# Altium PCB mofang.PcbDoc
Units mm, origin at the board's own origin, x right, y up, seen from the top; angles counter-clockwise.
Board outline 91.69 x 61.98 mm, 2 copper layers (Top Layer, Bottom Layer); 52 components, 59 nets, 291 pads, 70 vias.
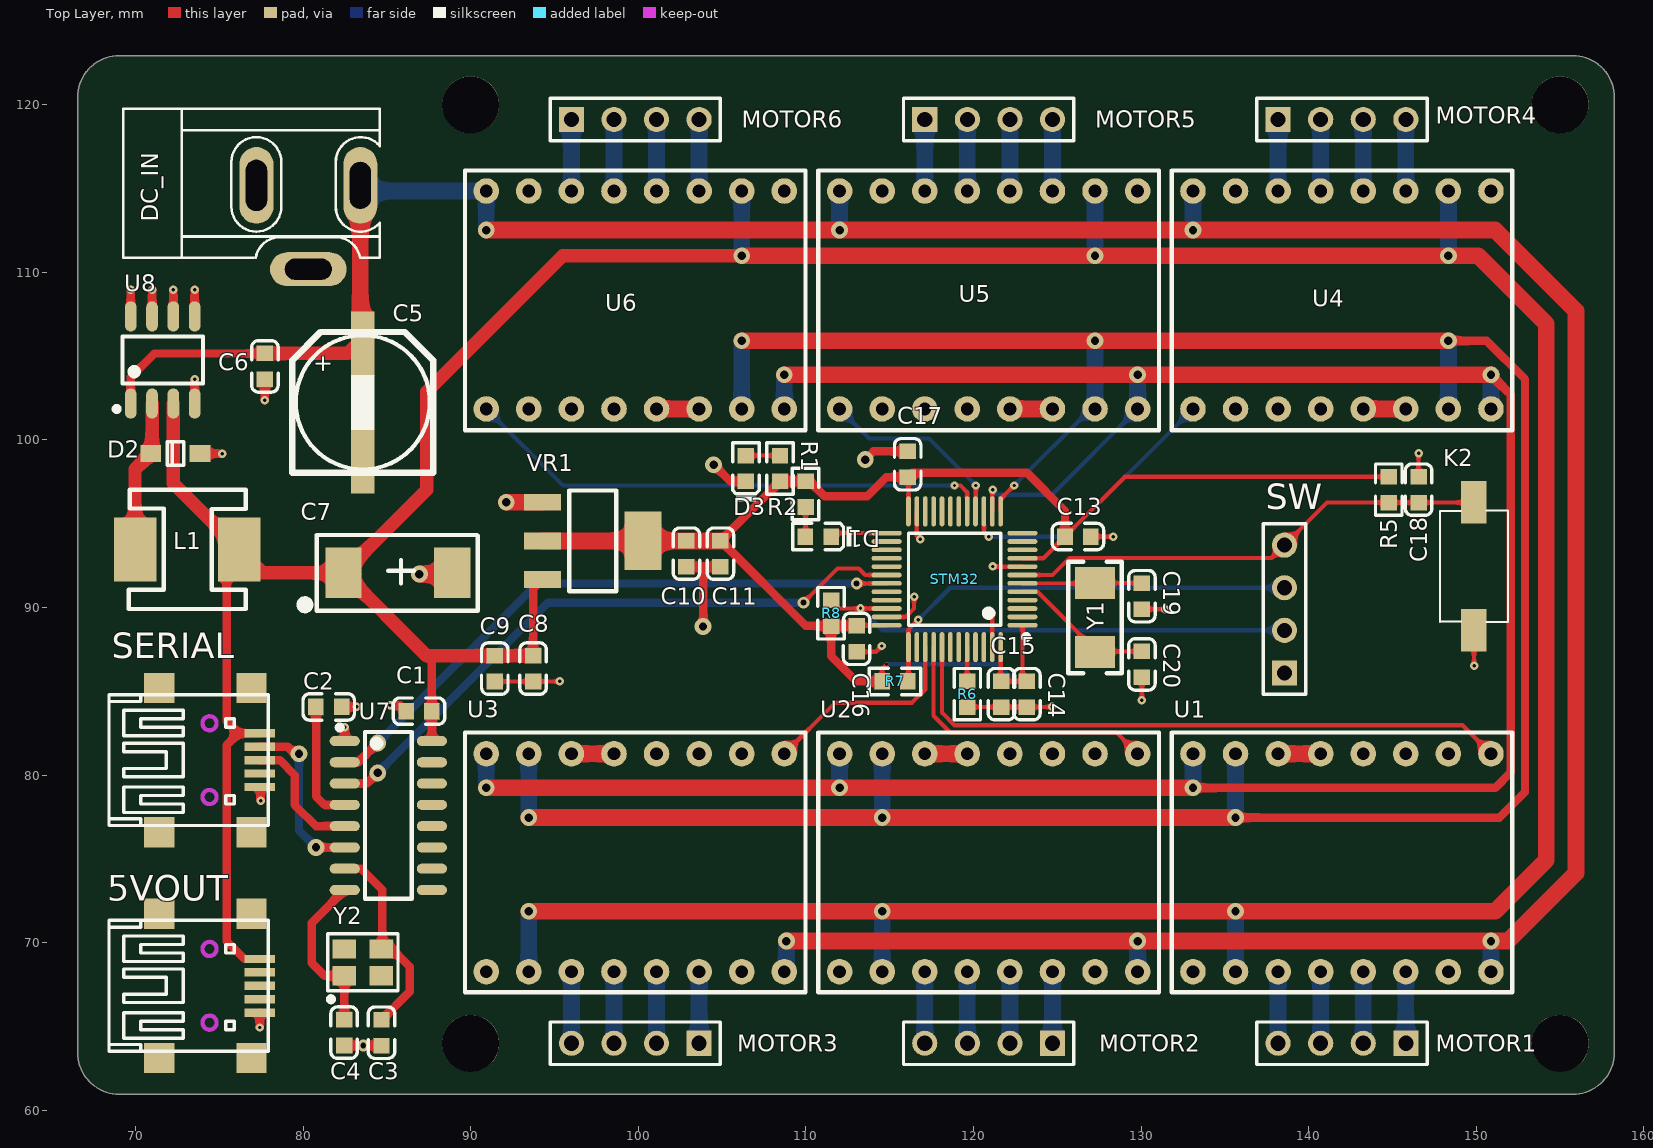
[diagram p0: Top Layer view]
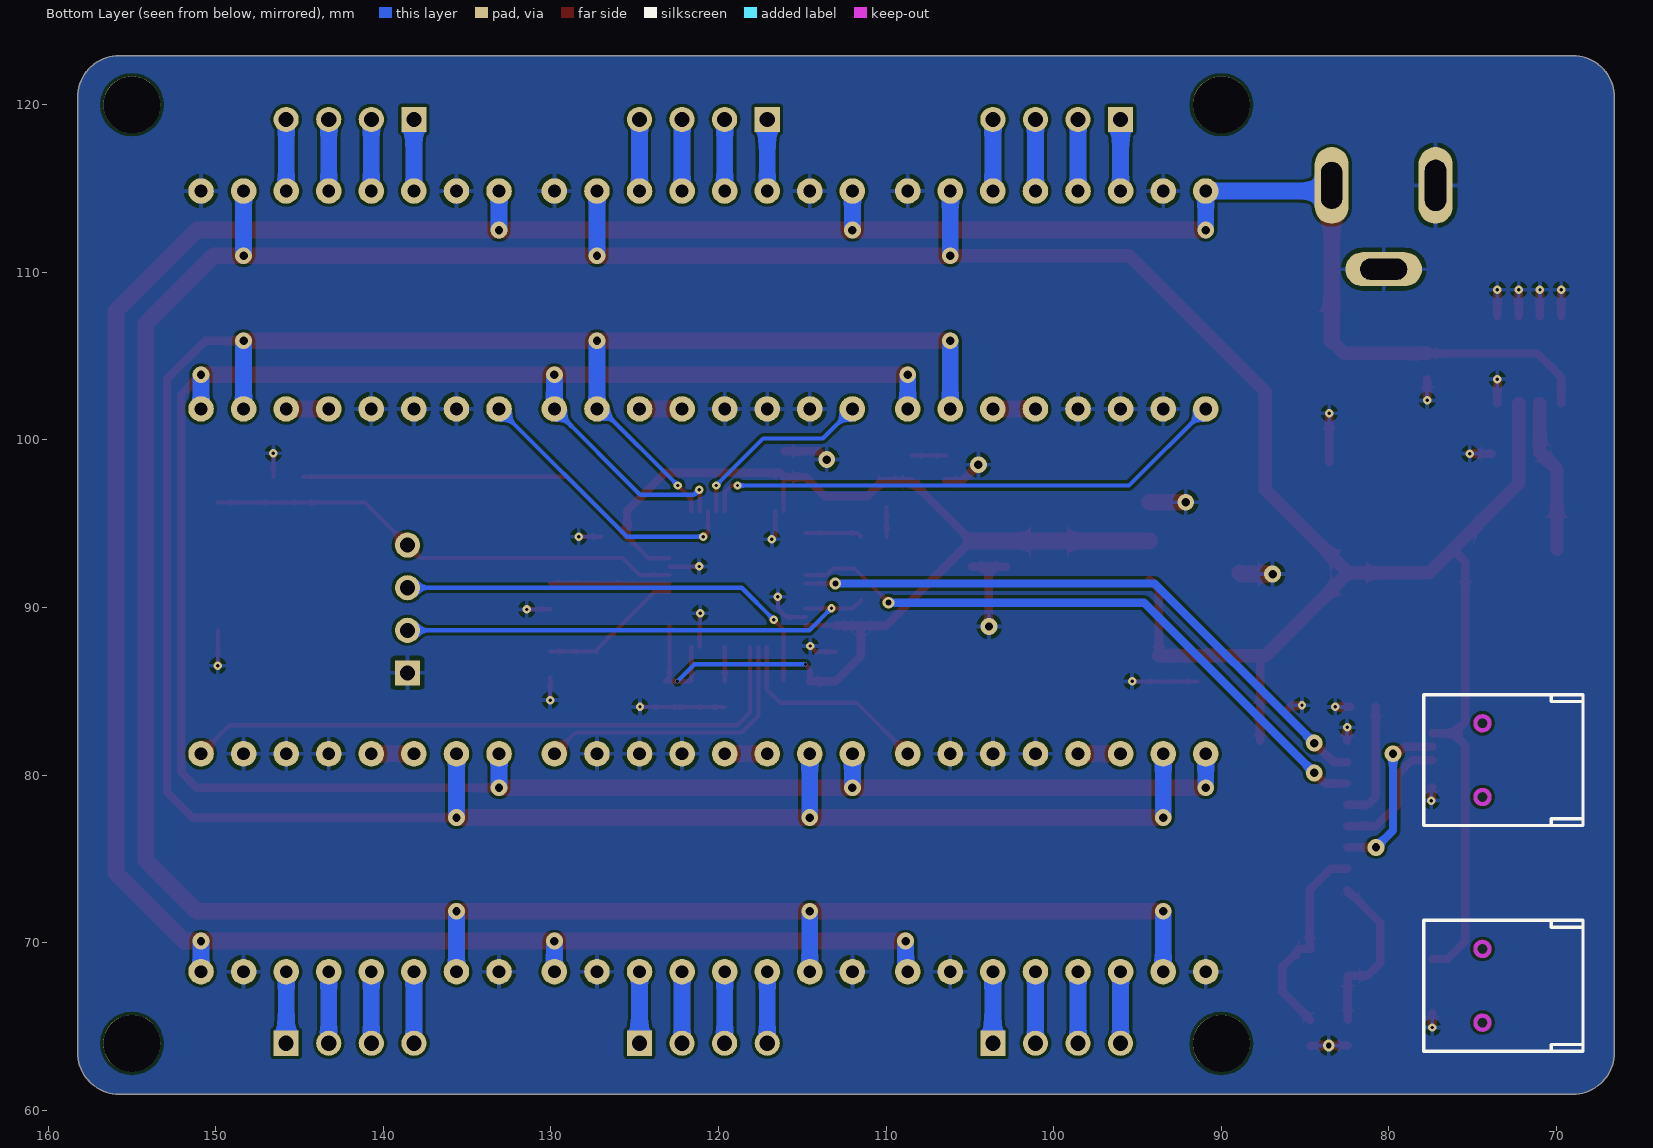
[diagram p1: Bottom Layer view, seen from below]
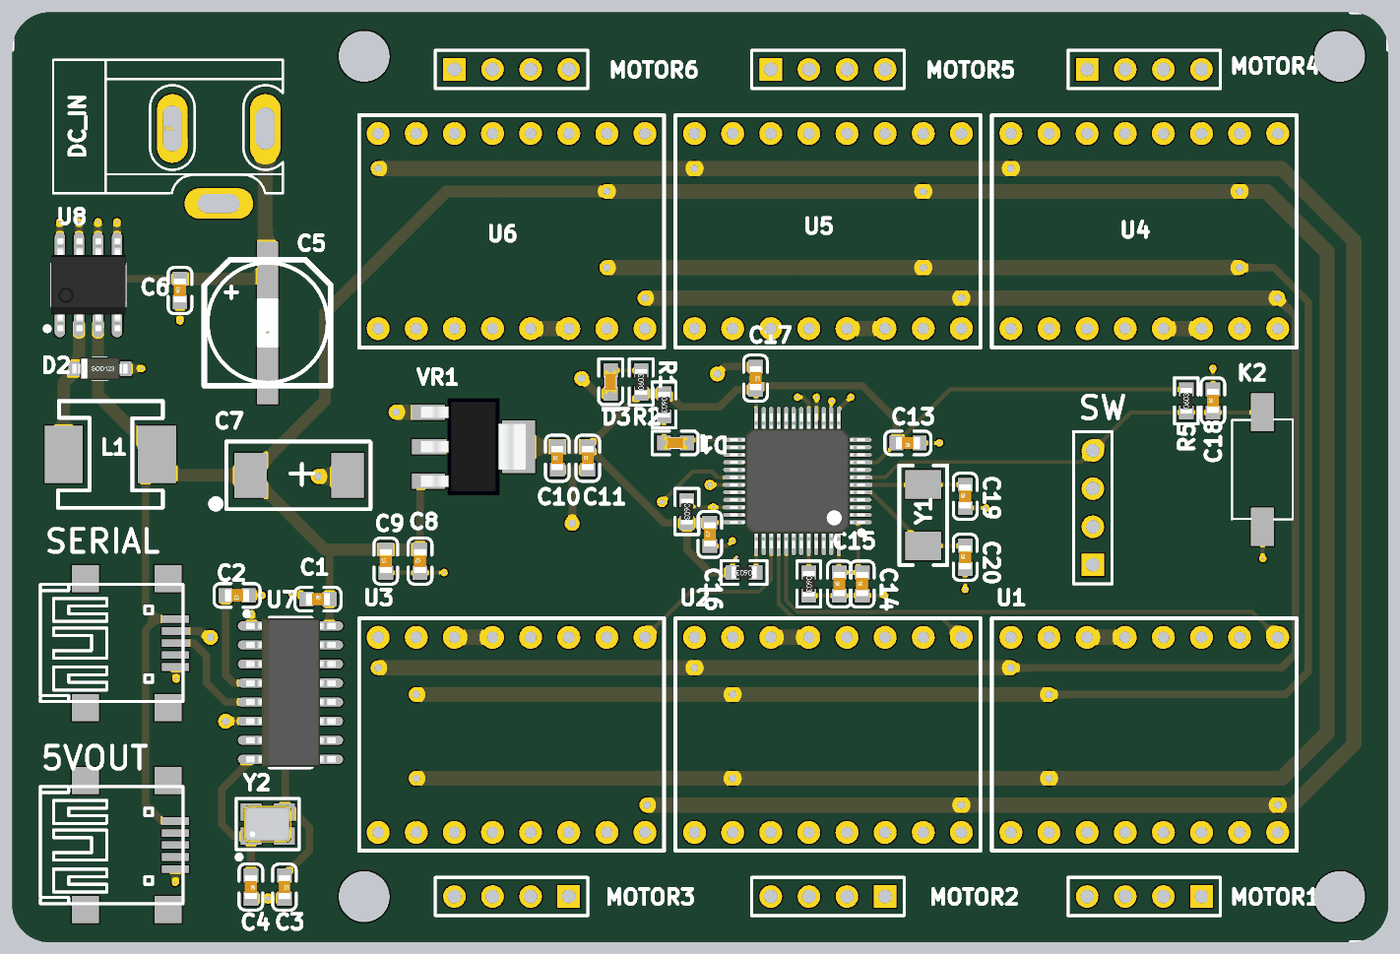
[diagram p2: 3D render of the assembled board from above, using the file's embedded part models]

## Layer stack, top to bottom
Top Solder: solder mask 0.0102, Solder Resist, Dk 3.5
Top Layer: signal copper 0.0356
Dielectric 1: dielectric 0.32, FR-4, Dk 4.8
Bottom Layer: signal copper 0.0356
Bottom Solder: solder mask 0.0102, Solder Resist, Dk 3.5

## Board outline
66.548,63.46 66.548,120.436 cw(c69.048,120.436) 69.048,122.936 155.742,122.936 cw(c155.742,120.436) 158.242,120.436 158.242,63.46 cw(c155.742,63.46) 155.742,60.96 69.048,60.96 cw(c69.048,63.46)

## Design rules (kind name [scope] priority, off if disabled: settings)
Clearance [All] p1: gap=0.178 ignorepadtopadclearanceinfootprint=FALSE
PolygonConnect [All] p1: connectstyle=Relief reliefconductorwidth=0.254 reliefentries=4 polygonreliefangle="90 Angle" airgapwidth=0.254
RoutingVias [All] p1: holewidth=0.711 width=1.27 viastyle="Through Hole" minholewidth=0.2 minwidth=0.5 maxholewidth=0.711 maxwidth=1.27
SolderMaskExpansion [All] p1: expansion=0.102
Width [All] p1: maxlimit=2.54 minlimit=0.254 preferedwidth=0.254 minimp=50.000000 maximp=50.000000 favimp=50.000000
30 further rules are at their usual default settings.

## Classes and differential pairs
component class mofang: MOTOR1 MOTOR2 MOTOR3 MOTOR4 MOTOR5 MOTOR6 U1 U2 U3 U4 U5 U6
component class mcu: 5VOUT C1 C2 C3 C4 C13 C14 C15 C16 C17 C18 C19 C20 D1 K2 R1 R5 R6 R7 R8 SERIAL SW U7 Y1 Y2 Y?
component class power: C5 C6 C7 C8 C9 C10 C11 D2 D3 DC_IN L1 R2 U8 VR1

## Components (designator, comment, footprint, x,y, rotation, side; value= is the part's Value field where it differs from the comment)
5VOUT "USB" USB_5 74.422,67.437 r90 top
C1 "100nF (104) 10% 50V" 0603_C 86.919,83.82 r0 top
C2 "100nF (104) 10% 50V" 0603_C 81.534,84.074 r180 top
C3 "20pF (200) 5% 50V" 0603_C 84.684,64.635 r270 top
C4 "20pF (200) 5% 50V" 0603_C 82.448,64.643 r270 top
C5 "Cap Pol3" SMD-EC-F8 83.566,102.235 r270 top value=470uF
C6 "100nF (104) 10% 50V" 0603_C 77.724,104.394 r90 top
C7 "Cap Pol3" 470UF_A 85.852,92.202 r0 top value=180uF
C8 "10uF (106) 10% 10V" 0603_C 93.726,86.36 r90 top
C9 "100nF (104) 10% 50V" 0603_C 91.44,86.36 r90 top
C10 "10uF (106) 10% 10V" 0603_C 102.87,93.218 r90 top
C11 "100nF (104) 10% 50V" 0603_C 104.902,93.218 r90 top
C13 "100nF (104) 10% 50V" 0603_C 126.23,94.234 r180 top
C14 "100nF (104) 10% 50V" 0603_C 123.19,84.836 r90 top
C15 "100nF (104) 10% 50V" 0603_C 121.666,84.836 r90 top
C16 "100nF (104) 10% 50V" 0603_C 113.03,88.138 r90 top
C17 "100nF (104) 10% 50V" 0603_C 116.078,98.552 r270 top
C18 "100nF (104) 10% 50V" 0603_C 146.558,97.036 r90 top
C19 "20pF (200) 5% 50V" 0603_C 130.048,90.678 r90 top
C20 "20pF (200) 5% 50V" 0603_C 130.048,86.614 r90 top
D1 "绿灯 0603" 0603_LED_S1 110.744,94.234 r180 top
D2 "B5819W  SL" SOD-123 72.39,99.187 r0 top
D3 "红灯 0603" 0603_LED_S1 106.426,98.298 r90 top
DC_IN "POWER" DC10B 72.771,110.871 r0 top
K2 "KEY" Key_Sop 149.86,92.456 r270 top
L1 "68uh 2A" 0630 68.707,91.567 r0 top value=68uh
MOTOR1 "Header 4" HDR1X4 145.796,64.008 r180 top
MOTOR2 "Header 4" HDR1X4 124.714,64.008 r180 top
MOTOR3 "Header 4" HDR1X4 103.632,64.008 r180 top
MOTOR4 "Header 4" HDR1X4 138.176,119.126 r0 top
MOTOR5 "Header 4" HDR1X4 117.094,119.126 r0 top
MOTOR6 "Header 4" HDR1X4 96.012,119.126 r0 top
R1 "10KΩ (1002) ±1%" 0603_R 109.982,96.774 r270 top
R2 "10KΩ (1002) ±1%" 0603_R 108.458,98.298 r90 top
R5 "10KΩ (1002) ±1%" 0603_R 144.78,97.036 r90 top
R6 "10KΩ (1002) ±1%" 0603_R 119.634,84.836 r270 top
R7 "10KΩ (1002) ±1%" 0603_R 115.316,85.598 r180 top
R8 "10KΩ (1002) ±1%" 0603_R 111.506,89.662 r270 top
SERIAL "USB" USB_5 74.422,80.899 r90 top
STM32 "STM32F103C8T6" LQFP-48_7x7x05P 118.872,91.694 r90 top
SW "Header 4" HDR1X4 138.557,86.106 r90 top
U1 "A4988" A4988 150.876,81.28 r270 top
U2 "A4988" A4988 129.794,81.28 r270 top
U3 "A4988" A4988 108.712,81.28 r270 top
U4 "A4988" A4988 133.096,101.854 r90 top
U5 "A4988" A4988 112.014,101.854 r90 top
U6 "A4988" A4988 90.932,101.854 r90 top
U7 "CH340G" SOIC-16_150mil 85.09,77.597 r270 top
U8 "XL1509-5.0E1" SOP-8_150mil 71.628,104.775 r0 top
VR1 "AMS1117-3.3" SOT-223 97.282,93.98 r180 top
Y1 "8MHz ±20ppm 20pF" SMD-5032_2P 127.254,89.408 r90 top
Y2 "12MHZ 20PF 10PPM" SMD-3225_4P 83.566,68.834 r0 top

## Footprints (in the part's own frame and the unit in brackets; to place one, negate y for a bottom-side part, rotate by r counter-clockwise, add the part's x,y. Pads: shape width x height; smd on the part's side, far side on the other; paste and mask are expansions set on the pad)
470UF_A [mm]
  rect 2.16x3 smd: 1(-3.429,-0.127) 2(3.048,-0.127)
  silkscreen extent -5.99,-2.39 4.57,2.13
0603_C [mm]
  rect 0.93x0.98 smd: 1(-0.77,0) 2(0.77,0)
  silkscreen extent -1.53,-0.79 1.54,0.79, body extent -0.8,-0.4 0.8,0.4, height 0.3
0603_LED_S1 [mm]
  rect 0.93x0.98 smd: A(0.77,0) K(-0.77,0)
  silkscreen extent -1.97,-0.79 1.54,0.79, body extent -0.8,-0.4 0.8,0.4, height 0.6
0603_R [mm]
  rect 0.93x0.98 smd: 1(-0.77,0) 2(0.77,0)
  silkscreen extent -1.53,-0.79 1.54,0.79, body extent -0.85,-0.4 0.85,0.4, height 0.56
0630 [mil]
  rect 100x150 smd: 1(50,75) 2(295,75)
  silkscreen extent 35,-65 310,215
A4988 [mil] "步进电机控制器"
  round 60 hole 30: 1(0,0) 2(0,-100) 3(0,-200) 4(0,-300) 5(0,-400) 6(0,-500) 7(0,-600) 8(0,-700) 9(511.81,-700) 10(511.81,-600) 11(511.81,-500) 12(511.81,-400) 13(511.81,-300) 14(511.81,-200) 15(511.81,-100) 16(511.81,0)
  silkscreen extent -50,-750 560,50
DC10B [mil]
  oval 80x180 hole 50 slot 110 at 90 deg: 1(419.09,170)
  oval 80x180 hole 50 slot 120 at 90 deg: 2(175,170)
  oval 180x80 hole 50 slot 110 at 0 deg: 3(297.05,-26.85)
  silkscreen extent -138,0 465,350
HDR1X4 [mm] "Connector; Header; 4 Position"
  rect 1.5x1.5 hole 0.9: 1(0,0)
  round 1.5 hole 0.9: 2(2.54,0) 3(5.08,0) 4(7.62,0)
  silkscreen extent -1.27,-1.27 8.89,1.27
Key_Sop [mil]
  rect 100x60 smd: 1(150,0) 2(-150.63,0)
  silkscreen extent -131,-80 131,80, body extent -156,-75 155,76, height 98
LQFP-48_7x7x05P [mm]
  oval 0.28x1.8 smd mask+0.051: 1(-2.75,-4.05) 2(-2.25,-4.05) 3(-1.75,-4.05) 4(-1.25,-4.05) 5(-0.75,-4.05) 6(-0.25,-4.05) 7(0.25,-4.05) 8(0.75,-4.05) 9(1.25,-4.05) 10(1.75,-4.05) 11(2.25,-4.05) 12(2.75,-4.05) 25(2.75,4.05) 26(2.25,4.05) 27(1.75,4.05) 28(1.25,4.05) 29(0.75,4.05) 30(0.25,4.05) 31(-0.25,4.05) 32(-0.75,4.05) 33(-1.25,4.05) 34(-1.75,4.05) 35(-2.25,4.05) 36(-2.75,4.05)
  oval 1.8x0.28 smd mask+0.051: 13(4.05,-2.75) 14(4.05,-2.25) 15(4.05,-1.75) 16(4.05,-1.25) 17(4.05,-0.75) 18(4.05,-0.25) 19(4.05,0.25) 20(4.05,0.75) 21(4.05,1.25) 22(4.05,1.75) 23(4.05,2.25) 24(4.05,2.75) 37(-4.05,2.75) 38(-4.05,2.25) 39(-4.05,1.75) 40(-4.05,1.25) 41(-4.05,0.75) 42(-4.05,0.25) 43(-4.05,-0.25) 44(-4.05,-0.75) 45(-4.05,-1.25) 46(-4.05,-1.75) 47(-4.05,-2.25) 48(-4.05,-2.75)
  silkscreen extent -3.6,-4.43 2.75,2.75, body extent -4.5,-4.5 4.5,4.5, height 1.6
SMD-3225_4P [mm]
  rect 1.4x1.15 smd: 1(-1.1,-0.8) 2(1.1,-0.8) 3(1.1,0.8) 4(-1.1,0.8)
  silkscreen extent -2.1,-2.35 2.1,1.7, body extent -1.6,-1.25 1.6,1.25, height 0.61
SMD-5032_2P [mm]
  rect 1.9x2.4 smd: 1(-2.05,0) 2(2.05,0)
  silkscreen extent -3.32,-1.6 3.32,1.6
SMD-EC-F8 [mm]
  rect 3.8x1.4 smd: 1(-3.525,0) 2(3.525,0)
  silkscreen extent -4.21,-4.22 4.19,4.2
SOD-123 [mm]
  rect 1.25x1 smd: 1(1.475,0) 2(-1.475,0)
  silkscreen extent -0.5,-0.7 0.5,0.7, body extent -1.85,-0.77 1.85,0.78, height 1.35
SOIC-16_150mil [mm]
  oval 0.6x1.8 smd: 1(-4.445,-2.6) 2(-3.175,-2.6) 3(-1.905,-2.6) 4(-0.635,-2.6) 5(0.635,-2.6) 6(1.905,-2.6) 7(3.175,-2.6) 8(4.445,-2.6) 9(4.445,2.6) 10(3.175,2.6) 11(1.905,2.6) 12(0.635,2.6) 13(-0.635,2.6) 14(-1.905,2.6) 15(-3.175,2.6) 16(-4.445,2.6)
  silkscreen extent -5.4,-3.05 4.97,1.4, body extent -4.95,-2.97 4.95,3.03, height 1.75
SOP-8_150mil [mm]
  oval 0.7x1.8 smd: 1(-1.905,-2.6) 2(-0.635,-2.6) 3(0.635,-2.6) 4(1.905,-2.6) 5(1.905,2.6) 6(0.635,2.6) 7(-0.635,2.6) 8(-1.905,2.6)
  silkscreen extent -2.9,-3.07 2.4,1.4, body extent -2.5,-3.1 2.5,3.1, height 1.75
SOT-223 [mm]
  rect 2.2x1 smd: 1(3,-2.3) 2(3,0) 3(3,2.3)
  rect 2.2x3.5 smd: 2(-3,0)
  silkscreen extent -1.4,-3 1.4,3, body extent -3.49,-3.24 3.49,3.24, height 1.64
USB_5 [mm]
  rect 0.5x1.8 smd: 1(1.6,-3) 2(0.8,-3) 3(0,-3) 4(-0.8,-3) 5(-1.6,-3)
  rect 1.8x1.8 smd: 6(4.3,-2.5) 7(4.3,3) 8(-4.3,3) 9(-4.3,-2.5)
  Keep-Out Layer circle w0.254: c2.2,0 r0.42
  Keep-Out Layer circle w0.254: c-2.2,0 r0.42
  silkscreen extent -3.9,-3.5 3.9,6

## Part data
5VOUT SERIAL: library part USB_2
C1 C2 C6 C9 C11 C13 C14 C15 C16 C17 C18: library part "0603 100nF (104) 10% 50V", "贴片电容", Package=0603, SuppliersPartNumber=C14663, ComponentLink1Description=供应商链接, ComponentLink1URL=http://www.szlcsc.com/product/details_15331.html, Supplier=LC
C3 C4 C19 C20: library part "0603 20pF (200) 5% 50V", "贴片电容", Package=0603, SuppliersPartNumber=C1648, ComponentLink1Description=供应商链接, ComponentLink1URL=http://www.szlcsc.com/product/details_2000.html, Supplier=LC
C5 C7: "Polarized Capacitor (Surface Mount)", LatestRevisionDate=29-May-2009, LatestRevisionNote="IPC-7351 Footprint Added.", PackageDescription="Chip Capacitor", PackageReference=C0805, Published=8-Jun-2000, Publisher="Altium Limited"
C8 C10: library part "0603 10uF (106) 10% 10V", "贴片电容", Package=0603, SuppliersPartNumber=C19702, ComponentLink1Description=供应商链接, ComponentLink1URL=http://www.szlcsc.com/product/details_20411.html, Supplier=LC
D1: library part "0603 绿灯", "发光二极管", Package=0603, SuppliersPartNumber=C72043, ComponentLink1Description=供应商链接, ComponentLink1URL=http://www.szlcsc.com/product/details_73152.html, Supplier=LC
D2: library part "SOD-123 B5819W  SL", "肖特基二极管", Package=SOD-123, SuppliersPartNumber=C8598, ComponentLink1Description=供应商链接, ComponentLink1URL=http://www.szlcsc.com/product/details_9093.html, Supplier=LC
D3: library part "0603 红灯", "发光二极管", Package=0603, SuppliersPartNumber=C2286, ComponentLink1Description=供应商链接, ComponentLink1URL=http://www.szlcsc.com/product/details_2659.html, Supplier=LC
DC_IN: library part POW
K2: library part KEY_SOP, "贴片按键"
L1: library part Inductor, "Inductor", Code_IEC=1005, Code_JEITA=0402, LatestRevisionDate=17-Jul-2002, LatestRevisionNote="Re-released for DXP Platform.", PackageReference=0402-A, Published=8-Jun-2000, Publisher="Altium Limited"
MOTOR1 MOTOR2 MOTOR3 MOTOR4 MOTOR5 MOTOR6 SW: "Header, 4-Pin", LatestRevisionDate=17-Jul-2002, LatestRevisionNote="Re-released for DXP Platform.", Publisher="Altium Limited"
R1 R2 R5 R6 R7 R8: library part "0603 10KΩ (1002) 1%", "贴片电阻", Package=0603, SuppliersPartNumber=C25804, ComponentLink1Description=供应商链接, ComponentLink1URL=http://www.szlcsc.com/product/details_26547.html, Supplier=LC
STM32: "ARM", Package=LQFP-48_7x7x05P, SuppliersPartNumber=C8734, ComponentLink1Description=供应商链接, ComponentLink1URL=http://www.szlcsc.com/product/details_9243.html, Supplier=LC
U7: library part CH340G_[C14267], "USB", Package=SOIC-16_150mil, SuppliersPartNumber=C14267, ComponentLink1Description=供应商链接, ComponentLink1URL=http://www.szlcsc.com/product/details_14927.html, Supplier=LC
U8: library part XL1509-5.0E1_[C61063], "DC-DCоƬ", Package=SOP-8_150mil, SuppliersPartNumber=C61063, ComponentLink1Description=供应商链接, ComponentLink1URL=http://www.szlcsc.com/product/details_62115.html, Supplier=LC
VR1: library part "SOT-223 AMS1117-3.3", "低压差线性稳压(LDO)", Package=SOT-223, SuppliersPartNumber=C6186, ComponentLink1Description=供应商链接, ComponentLink1URL=http://www.szlcsc.com/product/details_6652.html, Supplier=LC
Y1: library part "SMD-5032_2P 8MHz 20ppm 20pF", "贴片晶振", Package=SMD-5032_2P, SuppliersPartNumber=C115962, ComponentLink1Description=供应商链接, ComponentLink1URL=http://www.szlcsc.com/product/details_117214.html, Supplier=LC
Y2: library part "SMD-3225_4P  12MHZ 20PF 10PPM", "贴片晶振", Package=SMD-3225_4P, SuppliersPartNumber=C9002, ComponentLink1Description=供应商链接, ComponentLink1URL=http://www.szlcsc.com/product/details_9522.html, Supplier=LC

## Free pads (board coordinates)
  round 3.4 hole 3.4 unplated: 2(155,120) 3(155,64) 4(90,120) 5(90,64)

## Via types
v1: diameter 1, hole 0.5, Top Layer to Bottom Layer, 33 vias
v2: diameter 0.5, hole 0.2, Top Layer to Bottom Layer, 32 vias
v3: diameter 0.7, hole 0.35, Top Layer to Bottom Layer, 3 vias
v4: diameter 0.2, hole 0.2, Top Layer to Bottom Layer, 2 vias

## Nets (pads, with @x,y where several pads share a name; then routed paths per layer and width w, separated by ;. In a path a pad name is that pad's centre, name@x,y a point inside that pad or via, vN(x,y) a via of type N, cw(c..) or ccw(c..) an arc to the next point about the centre after c; other vN are vias at no path point)
DIR: STM32.14 U1.8 U2.8 U3.8 U4.8 U5.8 U6.8 | length 152.3
  Top Layer w0.254: STM32.14 121.122,96.992 v2(121.158,97.028)
  Top Layer w0.5: v1(133.096,79.248) 151.13,79.248 152.066,80.184 152.066,102.696 v1(150.876,103.886)
  Top Layer w1: v1(90.932,79.248) v1(112.014,79.248) v1(133.096,79.248) ; v1(108.712,103.886) v1(129.794,103.886) v1(150.876,103.886)
  Bottom Layer w0.254: v2(121.158,97.028) 121.459,96.727 124.667,96.727 U5.8
  Bottom Layer w1: v1(90.932,79.248) U3.8 ; U6.8 v1(108.712,103.886) ; v1(112.014,79.248) U2.8 ; U5.8 v1(129.794,103.886) ; v1(133.096,79.248) U1.8 ; U4.8 v1(150.876,103.886)
EN1: STM32.41 U1.1 | length 37.7
  Top Layer w0.254: STM32.41 118.122,83.732 118.872,82.982 149.174,82.982 U1.1
EN2: STM32.40 U2.1 | length 17.2
  Top Layer w0.254: STM32.40 117.622,83.546 118.618,82.55 128.524,82.55 U2.1
EN3: STM32.39 U3.1 | length 12.5
  Top Layer w0.254: U3.1 111.76,84.328 116.332,84.328 117.122,85.118 STM32.39
EN4: STM32.15 U4.1 | length 17
  Top Layer w0.254: STM32.15 120.622,94.516 v2(120.904,94.234)
  Bottom Layer w0.254: v2(120.904,94.234) 125.476,94.234 U4.1
EN5: STM32.16 U5.1 | length 11.6
  Top Layer w0.254: STM32.16 120.142,95.764 v2(120.142,97.282)
  Bottom Layer w0.254: U5.1 113.781,100.087 117.337,100.087 v2(120.142,97.282)
EN6: STM32.17 U6.1 | length 31.9
  Top Layer w0.254: v2(118.872,97.282) 119.222,97.282 119.622,96.882 STM32.17
  Bottom Layer w0.254: U6.1 95.504,97.282 v2(118.872,97.282)
GND: 5VOUT.5 C1.1 C2.1 C3.2 C4.2 C5.2 C6.1 C7.2 C8.1 C9.1 C10.1 C11.1 C13.1 C14.1 C15.1 C16.1 C17.1 C18.2 C19.1 C20.1 D2.1 D3.K DC_IN.2 DC_IN.3 K2.1 R6.2 SERIAL.5 STM32.8 STM32.23 STM32.35 STM32.47 SW.1 U1.2 U1.3 U1.4 U1.9 U1.15 U2.2 U2.3 U2.4 U2.9 U2.15 U3.2 U3.3 U3.4 U3.9 U3.15 U4.2 U4.3 U4.4 U4.9 U4.15 U5.2 U5.3 U5.4 U5.9 U5.15 U6.2 U6.3 U6.4 U6.9 U6.15 U7.1 U8.4 U8.5 U8.6 U8.7 U8.8 VR1.1 | length 61.3
  Top Layer w0.254: C9.1 C8.1 95.318,85.59 v2(95.326,85.598) ; C16.1 114.19,87.368 v2(114.529,87.706) ; STM32.35 115.96,89.444 116.459,89.943 v2(116.459,90.653) ; STM32.23 116.622,94.274 v2(116.815,94.082) ; R6.2 C14.1 124.681,84.066 v2(124.689,84.074) ; v2(121.097,89.669) 121.122,89.644 STM32.47 ; v2(121.158,92.456) 121.17,92.444 STM32.8 ; C13.1 v2(128.346,94.234) ; v2(130.048,84.48) C20.1 ; C19.1 131.428,89.908 v2(131.445,89.891) ; C18.2 v2(146.558,99.212) ; K2.1 149.86,86.563 v2(149.885,86.538)
  Top Layer w0.5: U8.8 v2(69.723,108.966) ; U8.7 v2(70.993,108.966) ; U8.6 v2(72.263,108.966) ; U8.4 v2(73.533,103.632) ; U8.5 v2(73.533,108.966) ; D2.1 v2(75.184,99.187) ; v2(77.419,64.948) 77.422,64.951 5VOUT.5 ; SERIAL.5 77.47,79.251 v2(77.47,78.486) ; v2(77.724,102.362) C6.1 ; C2.1 v2(83.21,84.074) ; C4.2 v3(83.591,63.873) 84.676,63.873 C3.2 ; U7.1 82.49,82.846 v2(82.499,82.855) ; C5.2 v2(83.566,101.6) ; v2(85.192,84.176) 85.793,84.176 C1.1 ; C10.1 103.886,92.448 ; v1(103.861,88.875) 103.886,88.9 103.886,92.448 ; v1(104.496,98.527) 105.494,97.528 D3.K ; C11.1 103.886,92.448 ; v1(113.538,98.831) 114.029,99.322 C17.1
  Top Layer w1: v1(86.944,91.999) 88.824,91.999 C7.2 ; v1(92.126,96.291) 92.137,96.28 VR1.1
LED1: D1.K STM32.25 | length 3.4
  Top Layer w0.254: D1.K 111.724,94.444 STM32.25
NetC2_2: C2.2 U7.4 | length 7.3
  Top Layer w0.5: C2.2@80.78,84.074 80.78,78.732 81.28,78.232 U7.4
NetC3_1: C3.1 U7.7 Y2.3 | length 12.3
  Top Layer w0.5: U7.7 83.464,74.422 84.734,73.152 84.734,69.702 Y2.3 85.306,69.634 86.36,68.58 86.36,67.081 C3.1
NetC4_1: C4.1 U7.8 Y2.1 | length 10.1
  Top Layer w0.5: C4.1 82.466,65.431 Y2.1 81.293,68.034 80.518,68.809 80.518,71.18 U7.8
NetC19_2: C19.2 STM32.6 Y1.2 | length 7.1
  Top Layer w0.254: STM32.6 127.24,91.444 Y1.2 130.038,91.458 C19.2
NetC20_2: C20.2 STM32.5 Y1.1 | length 8.7
  Top Layer w0.254: STM32.5 123.811,90.944 127.254,87.501 Y1.1 127.28,87.384 C20.2
NetD1_A: D1.A R1.2 | length 1.8
  Top Layer w0.254: D1.A 109.982,94.242 R1.2
NetD2_2: D2.2 L1.1 U8.2 | length 9.1
  Top Layer w0.8: L1.1 69.977,98.249 D2.2 70.993,99.265 U8.2
NetD3_A: D3.A R2.2 | length 2
  Top Layer w0.254: D3.A R2.2
NetMOTOR1_1: MOTOR1.1 U1.14 | length 4.3
  Bottom Layer w1: MOTOR1.1 U1.14
NetMOTOR1_2: MOTOR1.2 U1.13 | length 4.3
  Bottom Layer w1: MOTOR1.2 U1.13
NetMOTOR1_3: MOTOR1.3 U1.12 | length 4.3
  Bottom Layer w1: MOTOR1.3 U1.12
NetMOTOR1_4: MOTOR1.4 U1.11 | length 4.3
  Bottom Layer w1: MOTOR1.4 U1.11
NetMOTOR2_1: MOTOR2.1 U2.14 | length 4.3
  Bottom Layer w1: MOTOR2.1 U2.14
NetMOTOR2_2: MOTOR2.2 U2.13 | length 4.3
  Bottom Layer w1: MOTOR2.2 U2.13
NetMOTOR2_3: MOTOR2.3 U2.12 | length 4.3
  Bottom Layer w1: MOTOR2.3 U2.12
NetMOTOR2_4: MOTOR2.4 U2.11 | length 4.3
  Bottom Layer w1: MOTOR2.4 U2.11
NetMOTOR3_1: MOTOR3.1 U3.14 | length 4.3
  Bottom Layer w1: MOTOR3.1 U3.14
NetMOTOR3_2: MOTOR3.2 U3.13 | length 4.3
  Bottom Layer w1: MOTOR3.2 U3.13
NetMOTOR3_3: MOTOR3.3 U3.12 | length 4.3
  Bottom Layer w1: MOTOR3.3 U3.12
NetMOTOR3_4: MOTOR3.4 U3.11 | length 4.3
  Bottom Layer w1: MOTOR3.4 U3.11
NetMOTOR4_1: MOTOR4.1 U4.14 | length 4.3
  Bottom Layer w1: U4.14 MOTOR4.1
NetMOTOR4_2: MOTOR4.2 U4.13 | length 4.3
  Bottom Layer w1: U4.13 MOTOR4.2
NetMOTOR4_3: MOTOR4.3 U4.12 | length 4.3
  Bottom Layer w1: U4.12 MOTOR4.3
NetMOTOR4_4: MOTOR4.4 U4.11 | length 4.3
  Bottom Layer w1: U4.11 MOTOR4.4
NetMOTOR5_1: MOTOR5.1 U5.14 | length 4.3
  Bottom Layer w1: U5.14 MOTOR5.1
NetMOTOR5_2: MOTOR5.2 U5.13 | length 4.3
  Bottom Layer w1: U5.13 MOTOR5.2
NetMOTOR5_3: MOTOR5.3 U5.12 | length 4.3
  Bottom Layer w1: U5.12 MOTOR5.3
NetMOTOR5_4: MOTOR5.4 U5.11 | length 4.3
  Bottom Layer w1: U5.11 MOTOR5.4
NetMOTOR6_1: MOTOR6.1 U6.14 | length 4.3
  Bottom Layer w1: U6.14 MOTOR6.1
NetMOTOR6_2: MOTOR6.2 U6.13 | length 4.3
  Bottom Layer w1: U6.13 MOTOR6.2
NetMOTOR6_3: MOTOR6.3 U6.12 | length 4.3
  Bottom Layer w1: U6.12 MOTOR6.3
NetMOTOR6_4: MOTOR6.4 U6.11 | length 4.3
  Bottom Layer w1: U6.11 MOTOR6.4
NetR6_1: R6.1 STM32.44 | length 2
  Top Layer w0.254: STM32.44 119.622,85.618 R6.1
NetU1_5: U1.5 U1.6 | length 2.5
  Top Layer w1: U1.6 U1.5
NetU2_5: U2.5 U2.6 | length 2.5
  Top Layer w1: U2.6 U2.5
NetU3_5: U3.5 U3.6 | length 2.5
  Top Layer w1: U3.6 U3.5
NetU4_5: U4.5 U4.6 | length 2.5
  Top Layer w1: U4.5 U4.6
NetU5_5: U5.5 U5.6 | length 2.5
  Top Layer w1: U5.5 U5.6
NetU6_5: U6.5 U6.6 | length 2.5
  Top Layer w1: U6.5 U6.6
NRST: C18.1 K2.2 R5.1 STM32.7 SW.4 | length 28.7
  Top Layer w0.254: STM32.7 124.71,91.944 125.73,92.964 137.795,92.964 SW.4 141.097,96.266 R5.1 C18.1 149.844,96.266 K2.2
RXD: STM32.30 U7.3 | length 37.8
  Top Layer w0.254: v3(109.855,90.297) 109.855,90.302 111.882,92.329 113.157,92.329 113.542,91.944 STM32.30
  Top Layer w0.5: U7.3 83.82,79.502 v1(84.455,80.137)
  Bottom Layer w0.5: v1(84.455,80.137) 94.615,90.297 v3(109.855,90.297)
STEP: STM32.13 U1.7 U2.7 U3.7 U4.7 U5.7 U6.7 | length 164.6
  Top Layer w0.254: STM32.13 121.622,96.476 v2(122.428,97.282)
  Top Layer w0.5: v1(135.636,77.47) 151.384,77.47 152.908,78.994 152.908,103.632 150.622,105.918 v1(148.336,105.918)
  Top Layer w1: v1(93.472,77.47) v1(114.554,77.47) v1(135.636,77.47) ; v1(106.172,105.918) v1(127.254,105.918) v1(148.336,105.918)
  Bottom Layer w0.254: v2(122.428,97.282) 127,101.854 U5.7
  Bottom Layer w1: v1(93.472,77.47) U3.7 ; U6.7 v1(106.172,105.918) ; v1(114.554,77.47) U2.7 ; U5.7 v1(127.254,105.918) ; v1(135.636,77.47) U1.7 ; U4.7 v1(148.336,105.918)
SWCLK: R7.1 STM32.37 SW.3 | length 26.5
  Top Layer w0.254: R7.1@116.122,85.65 STM32.37 116.122,88.69 v2(116.713,89.281)
  Bottom Layer w0.254: v2(116.713,89.281) 118.618,91.186 SW.3
SWDIO: R8.1 STM32.34 SW.2 | length 29.4
  Top Layer w0.254: R8.1 111.994,89.944 STM32.34
  Bottom Layer w0.254: v2(113.259,89.967) 114.579,88.646 SW.2
TXD: STM32.31 U7.2 | length 36.8
  Top Layer w0.254: v3(113.03,91.44) 114.818,91.44 STM32.31
  Top Layer w0.5: U7.2 83.312,80.772 v1(84.455,81.915)
  Bottom Layer w0.5: v1(84.455,81.915) 93.98,91.44 v3(113.03,91.44)
USB_D+: SERIAL.3 U7.5 | length 7.7
  Top Layer w0.5: SERIAL.3 78.613,80.899 79.502,80.01 79.502,78.232 80.772,76.962 U7.5
USB_D-: SERIAL.2 U7.6 | length 10.2
  Top Layer w0.5: SERIAL.2 79.083,81.699 79.502,81.28 v1(79.756,81.28) ; v1(80.772,75.692) U7.6
  Bottom Layer w0.5: v1(79.756,81.28) 79.756,76.708 v1(80.772,75.692)
V+: C5.1 C6.2 DC_IN.1 U1.16 U2.16 U3.16 U4.16 U5.16 U6.16 U8.1 | length 195
  Top Layer w0.5: U8.1 69.723,103.759 71.128,105.164 C6.2
  Top Layer w0.8: C6.2 82.67,105.164 C5.1@83.416,105.91
  Top Layer w1: C5.1@83.416,105.91 DC_IN.1 ; v1(90.932,112.522) v1(112.014,112.522) v1(133.096,112.522) 151.13,112.522 155.956,107.696 155.956,74.168 151.892,70.104 v1(150.876,70.104) v1(129.794,70.104) v1(108.839,70.104)
  Bottom Layer w1: DC_IN.1 83.751,114.854 U6.16 v1(90.932,112.522) ; U3.16 108.839,68.407 v1(108.839,70.104) ; v1(112.014,112.522) U5.16 ; U2.16 v1(129.794,70.104) ; v1(133.096,112.522) U4.16 ; U1.16 v1(150.876,70.104)
VCC3V3: C10.2 C11.2 C13.2 C14.2 C15.2 C16.2 C17.2 R1.1 R2.1 R5.2 R7.2 R8.2 STM32.1 STM32.9 STM32.24 STM32.36 STM32.48 VR1.2 | length 95.7
  Top Layer w0.254: C16.2 113.066,88.944 STM32.36 ; R7.2 114.546,86.352 v4(114.808,86.614) ; C17.2 116.122,97.738 STM32.24 ; STM32.48 121.622,85.65 C15.2 C14.2 122.922,85.874 STM32.1 ; STM32.9 124.17,92.944 C13.2 129.032,97.806 R5.2
  Top Layer w0.5: C11.2 C11.2@104.918,93.988 ; R8.2 111.506,87.122 113.03,85.598 R7.2 ; C16.2 110.002,88.908 104.922,93.988 C11.2@104.918,93.988 ; C13.2 125.46,95.774 123.19,98.044 116.34,98.044 C17.2 114.8,97.782 113.653,96.635 111.129,96.635 110.236,97.528 R2.1 C11.2@104.918,93.988
  Top Layer w1: VR1.2@94.282,93.98 100.282,93.98 104.894,93.98 C11.2
  Bottom Layer w0.254: v4(114.808,86.614) 121.446,86.614 v4(122.456,85.604)
VCC5V: 5VOUT.1 C1.2 C7.1 C8.2 C9.2 L1.2 SERIAL.1 U1.10 U2.10 U3.10 U4.10 U5.10 U6.10 U7.16 U8.3 VR1.3 | length 269.5
  Top Layer w0.5: L1.2 75.438,92.71 75.438,83.21 76.149,82.499 ; 5VOUT.1 76.505,69.037 75.438,70.104 75.438,81.788 76.149,82.499 ; SERIAL.1 76.149,82.499 ; 87.368,87.13 87.689,86.809 C1.2 87.689,82.043 U7.16 ; C8.2 93.726,91.124 VR1.3
  Top Layer w0.8: U8.3 72.263,97.409 L1.2 77.597,92.075 C7.1 ; C8.2 87.368,87.13 C7.1 ; v1(106.172,110.998) 95.504,110.998 87.376,102.87 87.376,97.028 C7.1
  Top Layer w1: v1(93.472,71.882) v1(114.554,71.882) v1(135.636,71.882) 151.13,71.882 154.178,74.93 154.178,106.934 150.114,110.998 v1(148.336,110.998) v1(127.254,110.998) v1(106.172,110.998)
  Bottom Layer w1: U3.10 v1(93.472,71.882) ; v1(106.172,110.998) U6.10 ; U2.10 v1(114.554,71.882) ; v1(127.254,110.998) U5.10 ; U1.10 v1(135.636,71.882) ; v1(148.336,110.998) U4.10
pads on no net: 5VOUT.2 5VOUT.3 5VOUT.4 5VOUT.6 5VOUT.7 5VOUT.8 5VOUT.9 SERIAL.4 SERIAL.6 SERIAL.7 SERIAL.8 SERIAL.9 STM32.2 STM32.3 STM32.4 STM32.10 STM32.11 STM32.12 STM32.18 STM32.19 STM32.20 STM32.21 STM32.22 STM32.26 STM32.27 STM32.28 STM32.29 STM32.32 STM32.33 STM32.38 STM32.42 STM32.43 STM32.45 STM32.46 U7.9 U7.10 U7.11 U7.12 U7.13 U7.14 U7.15 Y2.2 Y2.4

## Polygon pours and split planes (outlines as drawn)
GND on Bottom Layer "GND" (solid, remove dead copper, pour order 8): 66.548,63.5 ccw(c69.088,63.5) 69.088,60.96 155.702,60.96 ccw(c155.702,63.5) 158.242,63.5 158.242,120.396 ccw(c155.702,120.396) 155.702,122.936 69.088,122.936 ccw(c69.088,120.396) 66.548,120.396

## Silkscreen, mask and mechanical layers (free items; w line width, h text height)
Mechanical 1:
  the board outline again, w0.254

## Dimensions
66.548,120.436 to 158.242,120.436 on Top Overlay
155.742,122.936 to 155.742,60.96 on Top Overlay

## Text inside footprints (layer, text, board x,y; h text height)
C5: Top Overlay "+" at 80.748,105.12 h1 r270